# EAGLE board 4x4v3 (EAGLE 8.5.0)
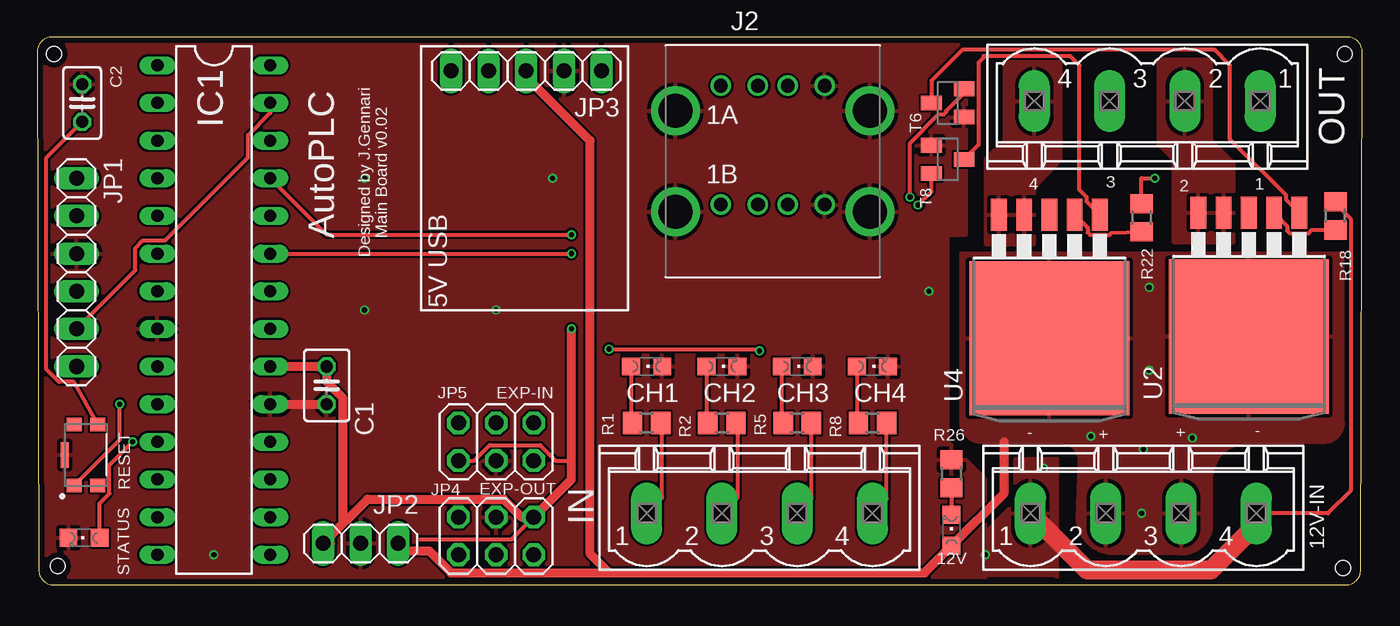
[diagram p0: board, top side]
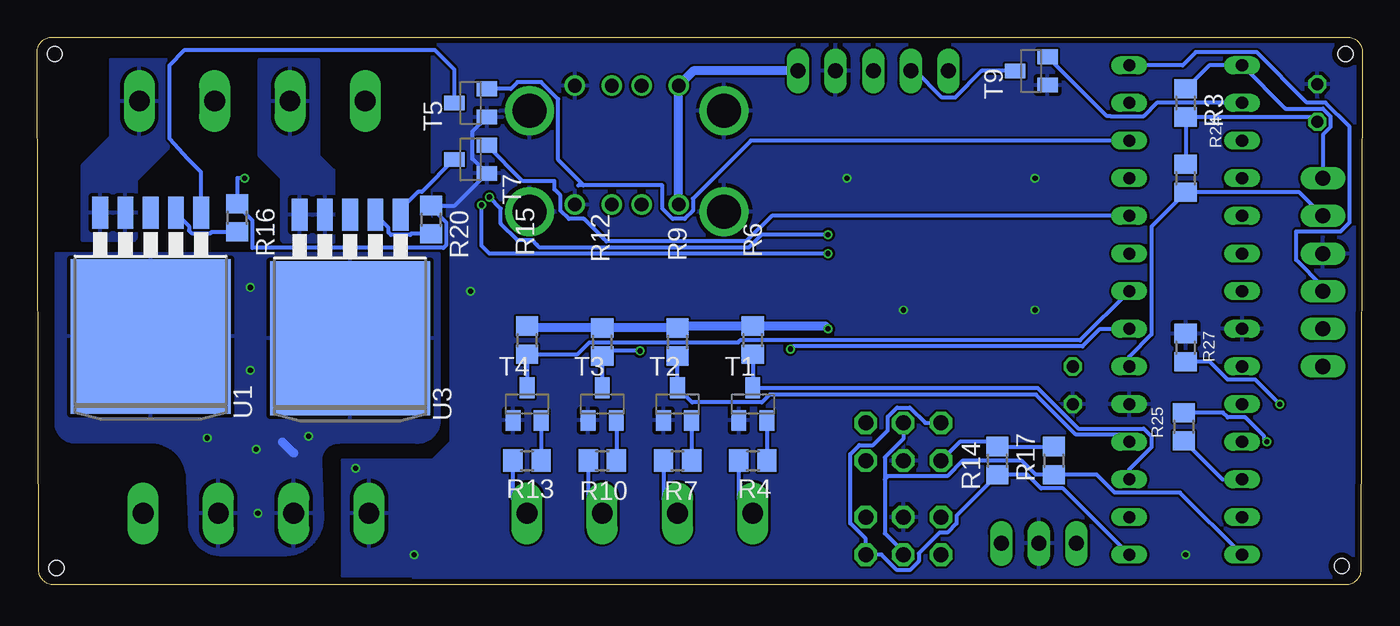
[diagram p1: board, bottom side, seen from below]

Size 89.45 x 36.95 mm. Coordinates in mm from the lower left corner, seen from the top.
Outline: 88.45,36.95 1,36.95 arc90 0,35.94 0.12,1 arc90 1.12,0 88.33,0 arc90 89.33,1 89.45,35.94 arc90 88.45,36.95
Copper layers (1*16): Top 0.035559375mm / dielectric 1.6mm / Bottom 0.035559375mm
Design rules "oshpark-2layer": minimum track width 6mil, minimum drill 10mil, track to track 6mil, track to pad 6mil, pad to pad 6mil, via to via 6mil, smd to smd 6mil, copper to edge 15mil, drill to drill 6mil, minimum pad ring 5mil, minimum via ring 5mil, stop-mask expansion 2.5mil, vias tented up to drill 0mil, thermal gap 10mil
Net classes: 0 default: width 0.203 mm, drill 0.305 mm; 1 pwr: width 0.559 mm, drill 0.305 mm
Holes 1 mm at 1.39,1.27 1.14,35.81 88.13,1.14 88.26,35.81

## Footprints (pad centres in the part's own frame; a part is rotated, then mirrored left to right if it is on the bottom)
MSTBV4 = drill 1.397 long: 1 -7.62,0; 2 -2.54,0; 3 2.54,0; 4 7.62,0
C025-030X050 = drill 0.813 octagon: 1 -1.27,0; 2 1.27,0
C025-025X050 = drill 0.813 octagon: 1 -1.27,0; 2 1.27,0
DIL28-3 = drill 0.813 long: 1 -16.51,-3.81; 2 -13.97,-3.81; 3 -11.43,-3.81; 4 -8.89,-3.81; 5 -6.35,-3.81; 6 -3.81,-3.81; 7 -1.27,-3.81; 8 1.27,-3.81; 9 3.81,-3.81; 10 6.35,-3.81; 11 8.89,-3.81; 12 11.43,-3.81; 13 13.97,-3.81; 14 16.51,-3.81; 15 16.51,3.81; 16 13.97,3.81; 17 11.43,3.81; 18 8.89,3.81; 19 6.35,3.81; 20 3.81,3.81; 21 1.27,3.81; 22 -1.27,3.81; 23 -3.81,3.81; 24 -6.35,3.81; 25 -8.89,3.81; 26 -11.43,3.81; 27 -13.97,3.81; 28 -16.51,3.81
614008235023 = drill 0.92: A1 -3.5,5.1; A2 -1,5.1; A3 1,5.1; A4 3.5,5.1; B1 -3.5,-2.92; B2 -1,-2.92; B3 1,-2.92; B4 3.5,-2.92 | drill 2.3: SHELL -6.57,3.4; SHELL1 6.57,3.4; SHELL2 -6.57,-3.4; SHELL3 6.57,-3.4
1X06 = drill 1.016 long: 1 -6.35,0; 2 -3.81,0; 3 -1.27,0; 4 1.27,0; 5 3.81,0; 6 6.35,0
1X03 = drill 1.016 long: 1 -2.54,0; 2 0,0; 3 2.54,0
1X05 = drill 1.016 long: 1 -5.08,0; 2 -2.54,0; 3 0,0; 4 2.54,0; 5 5.08,0
2X03 = drill 1.016 octagon: 1 -2.54,-1.27; 2 -2.54,1.27; 3 0,-1.27; 4 0,1.27; 5 2.54,-1.27; 6 2.54,1.27
CHIPLED_0805 = smd 1.2 x 1.2: A 0,-1.05; C 0,1.05
R0805 = smd 1.3 x 1.5: 1 -0.95,0; 2 0.95,0
SW_KMR421GULCLFS = smd 0.9 x 1: 1 -2.05,0.8; 2 -2.05,-0.8; 3 2.05,-0.8; 4 2.05,0.8 | smd 1.7 x 0.55: 5 0,1.425
SOT23-EBC = smd 1 x 1.4: B 0.95,-1.1; C 0,1.1; E -0.95,-1.1
TO263-5 = smd 1.067 x 2.159: 1 -3.404,-5.791; 2 -1.702,-5.791; 3 0,-5.791; 4 1.702,-5.791; 5 3.404,-5.791 | smd 10.8 x 10.41: 6 0,2.54

## Placement (x,y rotation side)
12V-IN  MSTBV4  [MSTBV4]  74.67,4.83 0 top
C1  0.1uF  [C025-030X050]  19.55,13.46 270 top
C2  100nF  [C025-025X050]  3.04,32.51 90 top
IC1  PIC18F2480-I/SP  [DIL28-3]  11.93,18.54 270 top
IN  MSTBV4  [MSTBV4]  48.76,4.83 0 top
J2  [614008235023]  49.65,28.58 0 top
JP1  ICSP  [1X06]  2.66,21.08 270 top
JP2  5V REG  [1X03]  21.84,2.79 180 top
JP3  5V USB  [1X05]  33.02,34.67 180 top
JP4  [2X03]  30.98,3.3 180 top
JP5  [2X03]  30.98,9.65 0 top
LED1  [CHIPLED_0805]  46.22,14.73 270 top
LED2  [CHIPLED_0805]  51.3,14.73 270 top
LED3  [CHIPLED_0805]  56.38,14.73 270 top
LED5  [CHIPLED_0805]  41.14,14.73 270 top
LED9  STATUS  [CHIPLED_0805]  3.17,3.17 90 top
LED10  [CHIPLED_0805]  61.72,3.68 0 top
OUT  MSTBV4  [MSTBV4]  74.93,32.64 180 top
R1  [R0805]  41.14,10.92 180 top
R2  [R0805]  46.22,10.92 180 top
R3  10k  [R0805]  11.93,32.51 270 bottom
R4  200k  [R0805]  41.14,8.38 0 bottom
R5  [R0805]  51.3,10.92 180 top
R6  20k  [R0805]  41.14,16.51 270 bottom
R7  200k  [R0805]  46.22,8.38 0 bottom
R8  [R0805]  56.38,10.92 180 top
R9  20k  [R0805]  46.22,16.38 270 bottom
R10  200k  [R0805]  51.3,8.38 0 bottom
R12  20k  [R0805]  51.3,16.38 270 bottom
R13  200k  [R0805]  56.38,8.38 0 bottom
R14  [R0805]  24.63,8.38 270 bottom
R15  20k  [R0805]  56.38,16.51 270 bottom
R16  [R0805]  75.94,24.77 270 bottom
R17  [R0805]  20.82,8.38 90 bottom
R18  [R0805]  87.63,24.89 270 top
R20  [R0805]  62.86,24.64 270 bottom
R22  [R0805]  74.55,24.77 270 top
R24  10k  [R0805]  11.93,27.43 270 bottom
R25  150R  [R0805]  12.06,10.67 90 bottom
R26  [R0805]  61.72,7.49 90 top
R27  100R  [R0805]  11.93,16 270 bottom
S1  KMR421GULCLFS  [SW_KMR421GULCLFS]  3.3,8.76 90 top
T1  BC547  [SOT23-EBC]  41.14,12.19 0 bottom
T2  BC547  [SOT23-EBC]  46.22,12.19 0 bottom
T3  BC547  [SOT23-EBC]  51.3,12.19 0 bottom
T4  BC547  [SOT23-EBC]  56.38,12.19 0 bottom
T5  [SOT23-EBC]  60.19,32.51 90 bottom
T6  [SOT23-EBC]  61.46,32.51 90 top
T7  [SOT23-EBC]  60.19,28.7 90 bottom
T8  [SOT23-EBC]  61.46,28.7 270 top
T9  [SOT23-EBC]  22.35,34.67 90 bottom
U1  IR3315  [TO263-5]  81.78,19.3 180 bottom
U2  IR3315  [TO263-5]  81.78,19.3 180 top
U3  IR3315  [TO263-5]  68.32,19.18 180 bottom
U4  IR3315  [TO263-5]  68.32,19.18 180 top

## Library data of the parts
12V-IN IN OUT = con-phoenix-508; MPN: MSTBV 2,5/4-GF-5.08; OC_FARNELL: 1792794; OC_NEWARK: 69R9847
C1 C2 R1-R10 R12-R18 R20 R22 R24-R27 = resistor
IC1 = microchip; MF: MICROCHIP; MPN: PIC18F2480-I/SP; OC_FARNELL: 9321217; OC_NEWARK: 71J7237
J2 = InputOutputIO (rev17e)
JP1-JP5 = pinhead
LED1-LED3 LED5 LED9 LED10 = led
S1 = KMR421GULCLFS; AVAILABILITY: Good; DESCRIPTION: Switch Tactile N.O. SPST Round Button Gull Wing 0.05A 32VDC 1VA 200000Cycles 2N SMD Automotive T/R; MF: C&K Components; MP: KMR421GULCLFS; PACKAGE: None; PRICE: 0.30 USD
T1-T9 = transistor
U1-U4 = jgennari

## Nets
12V [pwr]: 12V-IN.2 12V-IN.3 JP2.1 JP3.3 LED10.A U1.6 U2.6 U3.6 U4.6
EN: JP3.4 T9.C
GND: 12V-IN.1 12V-IN.4 C1.2 C2.2 IC1.8 IC1.19 J2.A4 J2.B4 J2.SHELL J2.SHELL1 J2.SHELL2 J2.SHELL3 JP1.3 JP2.2 JP3.2 JP4.3 JP5.3 LED1.C LED2.C LED3.C LED5.C LED9.C R16.1 R18.1 R20.1 R22.1 R26.2 R27.1 S1.5 T1.E T2.E T3.E T4.E T5.E T6.E T7.E T8.E T9.E
IN-1: IN.1 R1.1 R4.1
IN-2: IN.2 R2.1 R7.1
IN-3: IN.3 R5.1 R10.1
IN-4: IN.4 R8.1 R13.1
MCLR: IC1.1 JP1.1 R3.1
N$1: C2.1 R3.2 R24.1 S1.3
N$2: R27.2 S1.1
N$3: LED5.A R1.2
N$4: R4.2 T1.B
N$5: LED1.A R2.2
N$6: R7.2 T2.B
N$7: LED2.A R5.2
N$8: R10.2 T3.B
N$9: LED3.A R8.2
N$10: R13.2 T4.B
N$12: T5.C U1.1
N$13: R16.2 U1.2
N$15: T6.C U2.1
N$16: R18.2 U2.2
N$18: T7.C U3.1
N$19: R20.2 U3.2
N$21: T8.C U4.1
N$22: R22.2 U4.2
N$24: LED9.A R25.2
N$25: LED10.C R26.1
OUT-1 [pwr]: OUT.1 U1.4 U1.5
OUT-2 [pwr]: OUT.2 U2.4 U2.5
OUT-3 [pwr]: OUT.3 U3.4 U3.5
OUT-4 [pwr]: OUT.4 U4.4 U4.5
OUT-5: J2.A1 J2.B1 JP3.1
PGC: IC1.27 JP1.5
PGD: IC1.28 JP1.4
PGM: JP1.6
SCL: IC1.14 JP4.4 JP5.4 R17.1
SDA: IC1.15 JP4.2 JP5.2 R14.2
SIGIN-1: IC1.17 R6.2 T1.C
SIGIN-2: IC1.18 R9.2 T2.C
SIGIN-3: IC1.21 R12.2 T3.C
SIGIN-4: IC1.22 R15.2 T4.C
SIGOUT-1: IC1.26 T5.B
SIGOUT-2: IC1.25 T6.B
SIGOUT-3: IC1.24 T7.B
SIGOUT-4: IC1.23 T8.B
SIGOUT-5: IC1.2 T9.B
STATUS_LED: IC1.12 R25.1
VCC: C1.1 IC1.20 JP1.2 JP2.3 JP4.1 JP5.1 R6.1 R9.1 R12.1 R14.1 R15.1 R17.2 R24.2

## Tracks (layer width: path | path; a pad name or v marks a point on that pad's centre or on a via)
12V  (via drill 0.35)
  Top 0.61: LED10.A 65.27,6.19 65.27,9.65 | 61.12,2.03 LED10.A | LED10.A 59.9,0.81 38.6,0.81 | 38.6,0.81 27.94,0.81 26.47,2.29 24.89,2.29 JP2.1 | 38.6,0.81 37.33,2.08 37.33,29.97 33.02,34.29 JP3.3
  Bottom 0.61: 72.13,8.89 72.89,9.65
  other vias: 71.12,10.03 74.67,9.14 74.55,4.83 77.97,9.91 75.05,14.48 75.05,20.07
  pour Top: 62.35,22.35 62.35,10.92 arc90 64,9.65 69.08,9.65 arc-90 70.35,8.38 70.23,4.44 arc90 72.77,2.16 76.96,2.16 arc90 79.24,3.81 79.24,7.11 arc-90 81.78,9.65 86.86,9.65 arc90 88.13,10.92 88.13,22.35
  pour Bottom: 62.35,22.35 62.35,10.92 arc90 64,9.65 69.08,9.65 arc-90 70.35,8.38 70.23,4.44 arc90 72.89,2.03 77.09,2.03 arc90 79.12,4.32 79.24,7.11 arc-90 81.78,9.65 86.86,9.65 arc90 88.13,10.92 88.13,22.35
EN
  Bottom 0.254: T9.C 25.7,34.67 27.51,32.87 28.37,32.87 30.17,34.67 JP3.4
GND  (via drill 0.35)
  Top 0.254: R18.1 87.63,25.74 88.66,24.71 88.66,6.36 87.12,4.83 12V-IN.4 | 74.55,25.61 R22.1 74.55,27.43 v75.43,27.43 | T8.E 60.65,29.65
  Top 0.61: IC1.19 C1.2
  Top 1.27: 12V-IN.1 70.86,1.02 79.24,1.02 82.29,4.06 12V-IN.4
  Bottom 0.254: T5.E 60.07,30.59 60.07,30.27 60.07,28.73 T7.E 61.26,25.59 R20.1 62.86,25.48 61.83,24.45 61.83,22.92 62.02,22.73 74.91,22.73 74.91,24.58 75.94,25.61 R16.1 75.94,27.43 v75.43,27.43
  other vias: 64,2.03 22.09,27.43 22.09,18.54 30.98,18.54 34.79,27.43 11.93,2.03 60.19,19.81 67.94,7.87
  pour Top: -2.04,37.59 -2.04,-4.32 64,-4.32 64,7.11 61.46,9.65 61.46,23.62 62.73,23.62 62.73,37.59
  pour Bottom: -2.04,38.86 -2.04,-3.05 64,-3.05 64,7.11 61.46,9.65 61.46,24.89 62.73,24.89 62.73,38.86
  pour Top: 63.62,3.56 64,3.56 66.04,5.59 66.04,8.51 68.83,8.51 68.83,0.51 68.7,0.63 62.86,0.63 62.86,2.79
  pour Bottom: 61.46,8.38 68.83,8.38 68.83,0.63 61.34,0.63 61.34,8.26
IN-1
  Top 0.254: R1.1 42.19,10.82 42.19,5.88 IN.1
  Bottom 0.254: R4.1 42.09,5.78 IN.1
IN-2
  Top 0.254: R2.1 47.27,10.82 47.27,5.88 IN.2
  Bottom 0.254: R7.1 47.17,5.84 47.17,5.78 IN.2
IN-3
  Top 0.254: IN.3 52.25,5.78 R5.1
  Bottom 0.254: R10.1 52.25,5.78 IN.3
IN-4
  Top 0.254: R8.1 57.33,5.84 57.33,5.78 IN.4
  Bottom 0.254: IN.4 57.33,5.78 R13.1
MCLR
  Bottom 0.254: R3.1 10.34,35.05 IC1.1 5.2,32.13 2.68,32.13 2.16,31.61 2.16,30.87 2.66,30.37 JP1.1
N$1
  Top 0.254: S1.3 2.49,13.69 1.47,13.69 0.63,14.53 0.63,28.83 C2.1
  Bottom 0.254: R24.1 R3.2 3.36,31.56 C2.1
N$2  (via drill 0.35)
  Top 0.254: S1.1 5.58,9.8 v5.58,12.19
  Bottom 0.254: v5.58,12.19 7.24,13.84 9.1,13.84 10.31,15.05 R27.2
N$3
  Top 0.254: LED5.A 40.09,11.02 R1.2
N$4
  Bottom 0.254: T1.B R4.2
N$5
  Top 0.254: LED1.A 45.17,11.02 R2.2
N$6
  Bottom 0.254: T2.B R7.2
N$7
  Top 0.254: LED2.A 50.25,11.02 R5.2
N$8
  Bottom 0.254: T3.B R10.2
N$9
  Top 0.254: LED3.A 55.33,11.02 R8.2
N$10
  Bottom 0.254: T4.B R13.2
N$12
  Bottom 0.254: U1.1 78.38,27.84 79.24,28.7 80.51,30.1 80.51,35.05 79.47,36.09 62.61,36.09 61.29,34.78 T5.C
N$13
  Bottom 0.254: U1.2 79.19,24.21 79.19,23.9 79.03,23.74 77.73,23.74 77.65,23.82 R16.2
N$15
  Top 0.254: U2.1 84.3,25.98 84.3,26.29 80.51,30.08 80.51,35.05 79.47,36.09 62.44,36.09 60.36,34.02 T6.C
N$16
  Top 0.254: U2.2 84.38,24.21 84.38,23.9 84.54,23.74 85.84,23.74 86.04,23.94 R18.2
N$18
  Bottom 0.254: T7.C 63.48,26.52 63.73,26.52 64.92,25.33 U3.1
N$19
  Bottom 0.254: R20.2 64.19,23.69 64.27,23.61 65.57,23.61 65.73,23.77 65.73,24.08 U3.2
N$21
  Top 0.254: U4.1 70.84,25.86 70.84,26.16 70.35,26.65 70.35,35.05 69.72,35.69 64,35.69 | 63.88,35.69 64,35.69 | T8.C 63.54,29.68 63.54,33.78 63.54,34.08 63.54,35.23 64,35.69
N$22
  Top 0.254: U4.2 70.91,24.08 70.91,23.77 71.08,23.61 72.38,23.61 72.51,23.75 R22.2
N$24  (via drill 0.35)
  Top 0.254: LED9.A 4.22,5.49 4.88,6.15 4.88,8.08 v6.45,9.65
  Bottom 0.254: v6.45,9.65 6.63,9.83 6.63,10.02 7.91,11.3 9.1,11.3 9.42,11.62 R25.2
N$25
  Top 0.254: R26.1 LED10.C
OUT-1
  pour Bottom: 82.93,23.24 86.36,23.24 86.36,28.32 84.45,30.23 84.45,35.43 80.64,35.43 80.64,30.1 80.64,29.46 82.8,27.3 82.8,23.37
OUT-2
  pour Top: 76.7,23.11 80.77,23.11 80.77,28.45 79.24,29.97 79.24,35.43 75.69,35.43 75.69,29.72 76.7,28.7
OUT-3
  pour Bottom: 69.47,23.11 72.77,23.11 72.89,23.24 72.89,27.43 74.42,28.96 74.42,35.43 70.48,35.43 70.48,28.96 69.47,27.94
OUT-4
  pour Top: 64,22.99 67.31,22.99 67.31,26.8 69.08,28.7 69.08,35.31 65.27,35.31 65.27,29.97 64,28.7
OUT-5
  Bottom 0.61: J2.B1 J2.A1 45.16,34.67 JP3.1
PGC
  Top 0.254: JP1.5 6.63,21.23 6.63,22.72 7.15,23.24 8.63,23.24 14.25,28.85 14.25,30.34 15.74,31.84 IC1.27
PGD
  Bottom 0.254: JP1.4 2.66,20.12 4.47,21.92 4.47,23.85 1.47,23.85 0.86,24.46 0.86,30.89 2.51,32.54 3.74,32.54 7.15,35.94 11.25,35.94 12.14,35.05 IC1.28
SCL
  Bottom 0.254: JP5.4 30.98,9.85 32.24,8.6 32.24,7.11 | 32.24,7.11 32.24,3.48 30.98,2.22 JP4.4 | IC1.14 12.32,6.22 16.72,6.22 17.93,7.43 R17.1 22.04,7.43 22.97,8.36 26.99,8.36 28.01,7.34 32.01,7.34 32.24,7.11
SDA
  Bottom 0.254: IC1.15 20.22,6.5 21.69,6.5 22.62,7.43 R14.2 27.4,4.66 27.4,4.14 28.01,3.53 28.54,3.53 29.94,2.12 29.94,1.6 30.55,0.99 31.42,0.99 32.46,2.03 JP4.2 33.52,3.1 34.57,4.14 34.57,8.81 33.96,9.42 33.02,9.42 32.03,10.42 32.03,11.35 31.42,11.96 30.55,11.96 29.51,10.92 JP5.2
SIGIN-1
  Bottom 0.254: R6.2 T1.C 21.92,13.29 19.17,10.54 14.77,10.54 14.25,10.02 14.25,9.28 15.74,7.78 IC1.17
SIGIN-2
  Bottom 0.254: R9.2 T2.C 45.25,12.31 40.53,12.31 40.01,12.83 22.03,12.83 19.34,10.13 16.23,10.13 IC1.18
SIGIN-3  (via drill 0.35)
  Top 0.254: v38.6,15.91 48.64,15.91 v48.76,15.78
  Bottom 0.254: T3.C R12.2 50.96,15.78 v48.76,15.78 | v38.6,15.91 38.43,16.08 18.9,16.08 17.71,17.27 IC1.21
SIGIN-4
  Bottom 0.254: T4.C R15.2 52.97,15.56 52.17,16.36 42.14,16.36 42.01,16.49 19.07,16.49 IC1.22
SIGOUT-1
  Bottom 0.254: IC1.26 41.28,29.97 45.18,26.07 45.18,25.25 45.75,24.69 46.56,24.69 47.25,25.38 47.25,26.95 52.57,26.95 | 52.57,26.95 52.93,26.95 | 52.57,26.95 54.29,28.67 54.29,32.78 55.42,33.91 57.03,33.91 57.48,33.46 T5.B
SIGOUT-2  (via drill 0.35)
  Top 0.254: v36.06,23.62 19.55,23.62 IC1.25 | T6.B 62.56,33.16 61.34,31.94 61.34,31.9 61.18,31.73 60.85,31.73 58.92,29.81 v58.92,26.16
  Bottom 0.254: v36.06,23.62 40.56,23.62 40.85,23.33 41.42,22.76 55.53,22.76 55.73,22.96 56.01,23.24 57.03,23.24 58.16,24.37 58.16,25.39 v58.92,26.15 v58.92,26.16
SIGOUT-3
  Bottom 0.254: T7.B 56.68,27.24 54.53,27.24 54.53,26.68 54.12,26.27 54.12,25.25 53.56,24.69 52.54,24.69 51.39,23.54 51.22,23.37 51.02,23.16 41.59,23.16 39.86,24.89 IC1.24
SIGOUT-4  (via drill 0.35)
  Top 0.254: v59.46,25.63 60.36,26.53 T8.B | IC1.23 v36.06,22.35
  Bottom 0.254: v59.46,25.63 59.46,22.89 58.92,22.35 v36.06,22.35
SIGOUT-5
  Bottom 0.254: IC1.2 13.88,32.51 14.77,31.62 17.01,31.62 17.25,31.62 T9.B
STATUS_LED
  Bottom 0.254: R25.1 9.46,7.11 IC1.12
VCC  (via drill 0.35)
  Top 0.254: JP4.1 32.03,3.07 25.83,3.07 | JP5.1 29.51,8.38 30.55,9.42 33.96,9.42 35,8.38 36.06,8.38
  Top 0.61: IC1.20 C1.1 19.55,13.7 20.62,12.63 20.62,4.12 JP2.3 | v36.06,17.27 36.06,8.38 36.06,7.11 JP4.1 32.71,4.57 31.49,5.79 22.3,5.79 JP2.3 | 19.81,2.79 JP2.3
  Bottom 0.254: IC1.20 15.74,15.4 14.25,16.9 14.25,24.17 R24.2 4.25,26.48 JP1.2 | R17.2 R14.1 24.95,9.65 27.17,9.65 JP5.1
  Bottom 0.61: v36.06,17.27 36.25,17.46 R6.1 46.1,17.46 R9.1 R12.1 56.26,17.33 R15.1

## Text on the board
tPlace: 4 | 3 | 2 | 1 | AutoPLC | Main Board v0.02 | Designed by J.Gennari | RESET | - | + | + | - | STATUS
tNames: EXP-IN | CH1 | CH2 | CH3 | CH4 | EXP-OUT | 12V